# EAGLE board tire_temp (EAGLE 6.3)
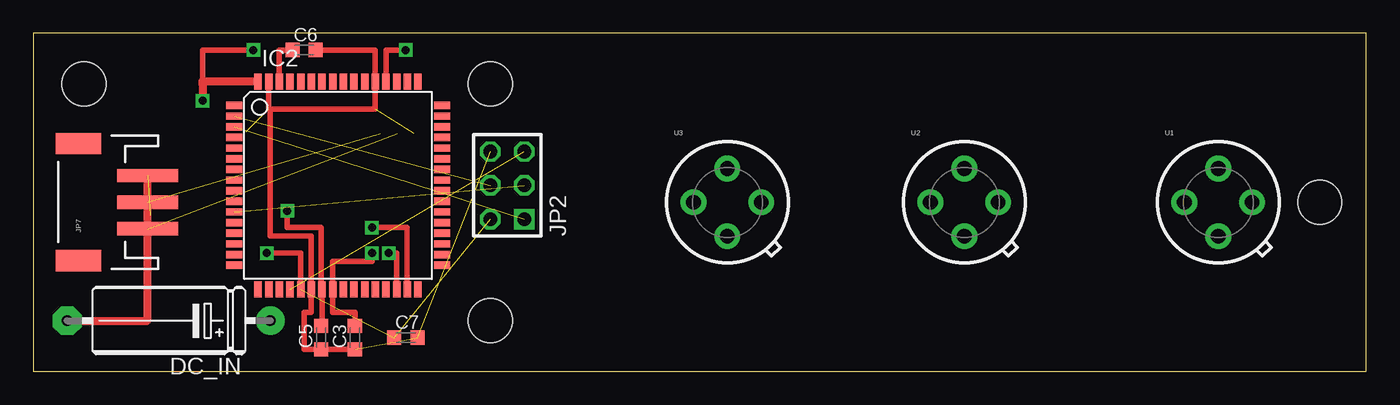
[diagram p0: board, top side]
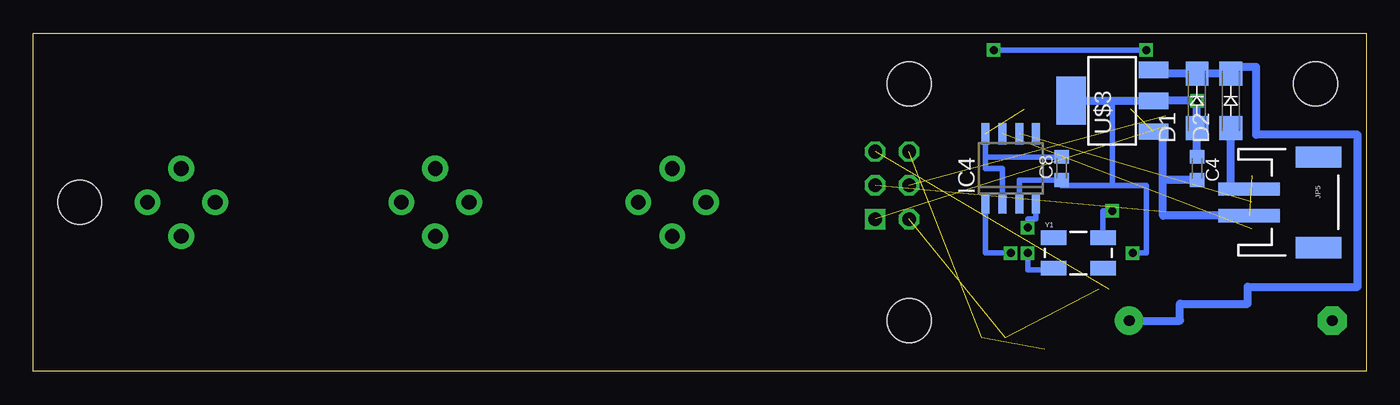
[diagram p1: board, bottom side, seen from below]

Size 100 x 25.39 mm. Coordinates in mm from the lower left corner, seen from the top.
Outline: 0,0 100,0 100,25.39 0,25.39 0,0
Copper layers (1*16): Top 0.035mm / dielectric 1.5mm / Bottom 0.035mm
Design rules "default": minimum track width 10mil, minimum drill 24mil, track to track 8mil, track to pad 8mil, pad to pad 8mil, via to via 8mil, smd to smd 8mil, copper to edge 40mil, drill to drill 8mil, minimum pad ring 10mil, minimum via ring 8mil, stop-mask expansion 4mil, vias tented up to drill 0mil, thermal gap 10mil

## Footprints (pad centres in the part's own frame; a part is rotated, then mirrored left to right if it is on the bottom)
C0603K = smd 1.05 x 1.08: 1 -0.875,0; 2 0.875,0
SMA-DO214AC = smd 1.8 x 1.7: A -2.05,0; K 2.05,0
E15-5 = drill 0.813 pad 2.159: + -7.62,0 | drill 0.813 pad 2.159 octagon: - 7.62,0
TQFP64 = smd 1.194 x 0.559: 1 -7.8,6; 2 -7.8,5.2; 3 -7.8,4.4; 4 -7.8,3.6; 5 -7.8,2.8; 6 -7.8,2; 7 -7.8,1.2; 8 -7.8,0.4; 9 -7.8,-0.4; 10 -7.8,-1.2; 11 -7.8,-2; 12 -7.8,-2.8; 13 -7.8,-3.6; 14 -7.8,-4.4; 15 -7.8,-5.2; 16 -7.8,-6; 33 7.8,-6; 34 7.8,-5.2; 35 7.8,-4.4; 36 7.8,-3.6; 37 7.8,-2.8; 38 7.8,-2; 39 7.8,-1.2; 40 7.8,-0.4; 41 7.8,0.4; 42 7.8,1.2; 43 7.8,2; 44 7.8,2.8; 45 7.8,3.6; 46 7.8,4.4; 47 7.8,5.2; 48 7.8,6 | smd 0.559 x 1.194: 17 -6,-7.8; 18 -5.2,-7.8; 19 -4.4,-7.8; 20 -3.6,-7.8; 21 -2.8,-7.8; 22 -2,-7.8; 23 -1.2,-7.8; 24 -0.4,-7.8; 25 0.4,-7.8; 26 1.2,-7.8; 27 2,-7.8; 28 2.8,-7.8; 29 3.6,-7.8; 30 4.4,-7.8; 31 5.2,-7.8; 32 6,-7.8; 49 6,7.8; 50 5.2,7.8; 51 4.4,7.8; 52 3.6,7.8; 53 2.8,7.8; 54 2,7.8; 55 1.2,7.8; 56 0.4,7.8; 57 -0.4,7.8; 58 -1.2,7.8; 59 -2,7.8; 60 -2.8,7.8; 61 -3.6,7.8; 62 -4.4,7.8; 63 -5.2,7.8; 64 -6,7.8
SO8 = smd 0.6 x 1.6: 1 -1.905,-2.6; 2 -0.635,-2.6; 3 0.635,-2.6; 4 1.905,-2.6; 5 1.905,2.6; 6 0.635,2.6; 7 -0.635,2.6; 8 -1.905,2.6
STAND-OFF = hole 3.302: 0,0
AVR-ISP-6 = drill 1.016 square: 1 -2.54,-1.27 | drill 1.016 octagon: 2 -2.54,1.27; 3 0,-1.27; 4 0,1.27; 5 2.54,-1.27; 6 2.54,1.27
JST-2-SMD = smd 1 x 4.6: 1 -1,-3.7; 2 1,-3.7 | smd 1.6 x 3.4: NC1 -3.4,1.5; NC2 3.4,1.5
JST-3-SMD = smd 1 x 4.6: 1 -1.99,-4.77; 2 0.01,-4.77; 3 2.01,-4.77 | smd 1.6 x 3.4: NC1 -4.39,0.43; NC2 4.41,0.43
TO-39 = drill 1.1 pad 1.93: 1 2.54,0; 2 0,2.54; 3 -2.54,0; 4 0,-2.54
SOT-232 = smd 1.219 x 2.235: 1 -2.311,-3.099; 2 0,-3.099; 3 2.311,-3.099 | smd 3.6 x 2.2: 4 0,3.099
CRYSTAL-SMD-5X3 = smd 1.9 x 1.1: 1 -1.85,-1.15; 2 1.85,-1.15; 3 1.85,1.15; 4 -1.85,1.15

## Placement (x,y rotation side)
C3  22pF  [C0603K]  24.13,2.54 90 top
C4  100nF  [C0603K]  12.7,15.24 270 bottom
C5  22pF  [C0603K]  21.59,2.54 90 top
C6  100nF  [C0603K]  20.32,24.13 0 top
C7  100nF  [C0603K]  27.94,2.54 0 top
C8  100nF  [C0603K]  22.86,15.24 90 bottom
D1  GF1  [SMA-DO214AC]  12.7,20.32 90 bottom
D2  GF1  [SMA-DO214AC]  10.16,20.32 90 bottom
DC_IN  330uF  [E15-5]  10.16,3.81 180 top
IC2  MEGA128-A  [TQFP64]  22.86,13.97 0 top
IC4  PCA82C250T  [SO8]  26.67,15.24 0 bottom
JP1  STAND-OFF  [STAND-OFF]  34.29,3.81 0 top
JP2  AVR-ISP-6  [AVR-ISP-6]  35.56,13.97 90 top
JP3  STAND-OFF  [STAND-OFF]  96.52,12.7 0 top
JP4  STAND-OFF  [STAND-OFF]  34.29,21.59 0 top
JP5  [JST-2-SMD]  5.08,12.7 270 bottom
JP6  STAND-OFF  [STAND-OFF]  3.81,21.59 0 top
JP7  [JST-3-SMD]  3.81,12.7 90 top
U1  MLX90614_  [TO-39]  88.9,12.7 0 top
U2  MLX90614_  [TO-39]  69.85,12.7 0 top
U3  MLX90614_  [TO-39]  52.07,12.7 0 top
U$3  TLV1117_VOLTAGE_REG  [SOT-232]  19.05,20.32 90 bottom
Y1  [CRYSTAL-SMD-5X3]  21.59,8.89 0 bottom

## Library data of the parts
C3-C8 DC_IN = rcl
D1 D2 = diode
IC2 = atmel
IC4 = micro-philips
JP1 JP3 JP4 JP6 = SparkFun
JP2 = avr-5
JP5 JP7 = SparkFun-Connectors
U1-U3 = SparkFun-Sensors
U$3 = unicorn_v2
Y1 = SparkFun-FreqCtrl

## Nets
1: IC2.15
+5V: C4.1 C7.1 C8.1 D1.A IC2.21 IC2.52 IC2.64 IC4.3 JP2.2 U$3.2 U$3.4
+12V: D2.A JP5.1
ADC_CS: IC2.61
ADC_POS: IC2.60
CANJUMP1: IC4.7 JP7.1
DIAGA: IC2.49
DIAGB: IC2.48
INA: IC2.51
INB: IC2.50
MISO/TXD0: IC2.3 JP2.1
MOSI/RXD0: IC2.2 JP2.4
N$1: C3.2 IC2.24 Y1.1
N$2: C5.2 IC2.23 Y1.3
N$10: C6.1 IC2.62
N$51: IC4.6 JP7.2
PE: C3.1 C4.2 C5.1 C6.2 C7.2 C8.2 DC_IN.- IC2.22 IC2.53 IC2.63 IC4.2 IC4.8 JP2.6 JP5.2 JP7.3 U$3.1
RESET: IC2.20 JP2.5
RXCAN: IC2.31 IC4.4
RXD1: IC2.27
SCK: IC2.11 JP2.3
SCL: IC2.25
SDA: IC2.26
TXCAN: IC2.30 IC4.1
TXD1: IC2.28
VCC: D1.K D2.K DC_IN.+ U$3.3

## Tracks (layer width: path | path; a pad name or v marks a point on that pad's centre or on a via)
+5V  (via drill 0.6)  (2 unrouted)
  Top 0.406: v27.94,24.13 26.46,24.13 IC2.52 | v16.51,24.13 12.7,24.13 12.7,21.59 | v17.52,8.89 20.06,8.89 IC2.21
  Top 0.61: IC2.64 12.7,21.77 12.7,21.59 v12.7,20.32
  Bottom 0.406: v27.94,24.13 v16.51,24.13 | IC4.3 26.04,14.37 C8.1 22.86,13.97 19.05,13.97 | U$3.4 19.05,20.32 19.05,13.97 | v17.52,8.89 16.51,8.89 16.51,13.97 19.05,13.97
  Bottom 0.61: C4.1 D1.A v12.7,20.32 U$3.2 U$3.4
+12V
  Bottom 0.61: JP5.1 10.16,13.7 D2.A
CANJUMP1  (1 unrouted)
MISO/TXD0  (1 unrouted)
MOSI/RXD0  (1 unrouted)
N$1  (via drill 0.6)
  Top 0.406: v25.4,8.89 25.4,8.26 22.46,8.26 IC2.24 22.46,4.45 24.13,4.45 C3.2
  Bottom 0.406: v25.4,8.89 25.4,7.62 24.13,7.62 24.13,7.74 Y1.1
N$2  (via drill 0.6)
  Top 0.406: v19.05,12.06 19.05,10.79 21.59,10.79 21.59,6.17 IC2.23 21.66,3.41 C5.2
  Bottom 0.406: v19.05,12.06 19.74,12.06 Y1.3
N$10
  Top 0.406: C6.1 18.46,24.13 IC2.62
N$51  (1 unrouted)
PE  (5 unrouted)
  Top 0.406: 17.78,19.69 25.66,19.69 IC2.53 25.66,24.13 C6.2 | IC2.63 17.66,19.69 17.78,19.69 | 17.78,19.69 17.78,10.16 20.86,10.16 IC2.22 20.86,4.45 20.32,4.45 20.32,1.67 C5.1 C3.1
  Top 0.61: DC_IN.- 8.58,3.81 JP7.3
  Bottom 0.406: IC4.2 27.3,15.24 28.57,15.24 IC4.8 28.57,16.12 C8.2
  Bottom 0.61: U$3.1 15.24,18.01 15.24,14.37 | JP5.2 15.24,11.7 15.24,14.37 | C4.2 15.24,14.37
RESET  (1 unrouted)
RXCAN  (via drill 0.6)
  Top 0.406: v25.4,10.79 28.06,10.79 IC2.31
  Bottom 0.406: IC4.4 24.77,11.43 25.4,11.43 v25.4,10.79
SCK  (1 unrouted)
TXCAN  (via drill 0.6)
  Top 0.406: v26.67,8.89 27.26,8.89 IC2.30
  Bottom 0.406: v26.67,8.89 28.57,8.89 IC4.1
VCC
  Bottom 0.61: D1.K D2.K 10.16,22.86 8.26,22.86 8.26,17.78 0.64,17.78 0.64,6.35 8.89,6.35 8.89,5.08 13.97,5.08 13.97,3.81 DC_IN.+ | D1.K 12.7,22.86 | U$3.3 16.51,22.63 | 16.51,22.63 16.51,22.86 | D1.K 16.51,22.37 16.51,22.63